# Altium PCB testboard_chip1_wafertest.PcbDoc
Units mm, origin at the board's own origin, x right, y up, seen from the top; angles counter-clockwise.
Board outline 57 x 82.5 mm, 2 copper layers (Top Layer, Bottom Layer); 56 components, 100 nets, 393 pads, 91 vias.
Unrouted connection lines stored in the file: 71.
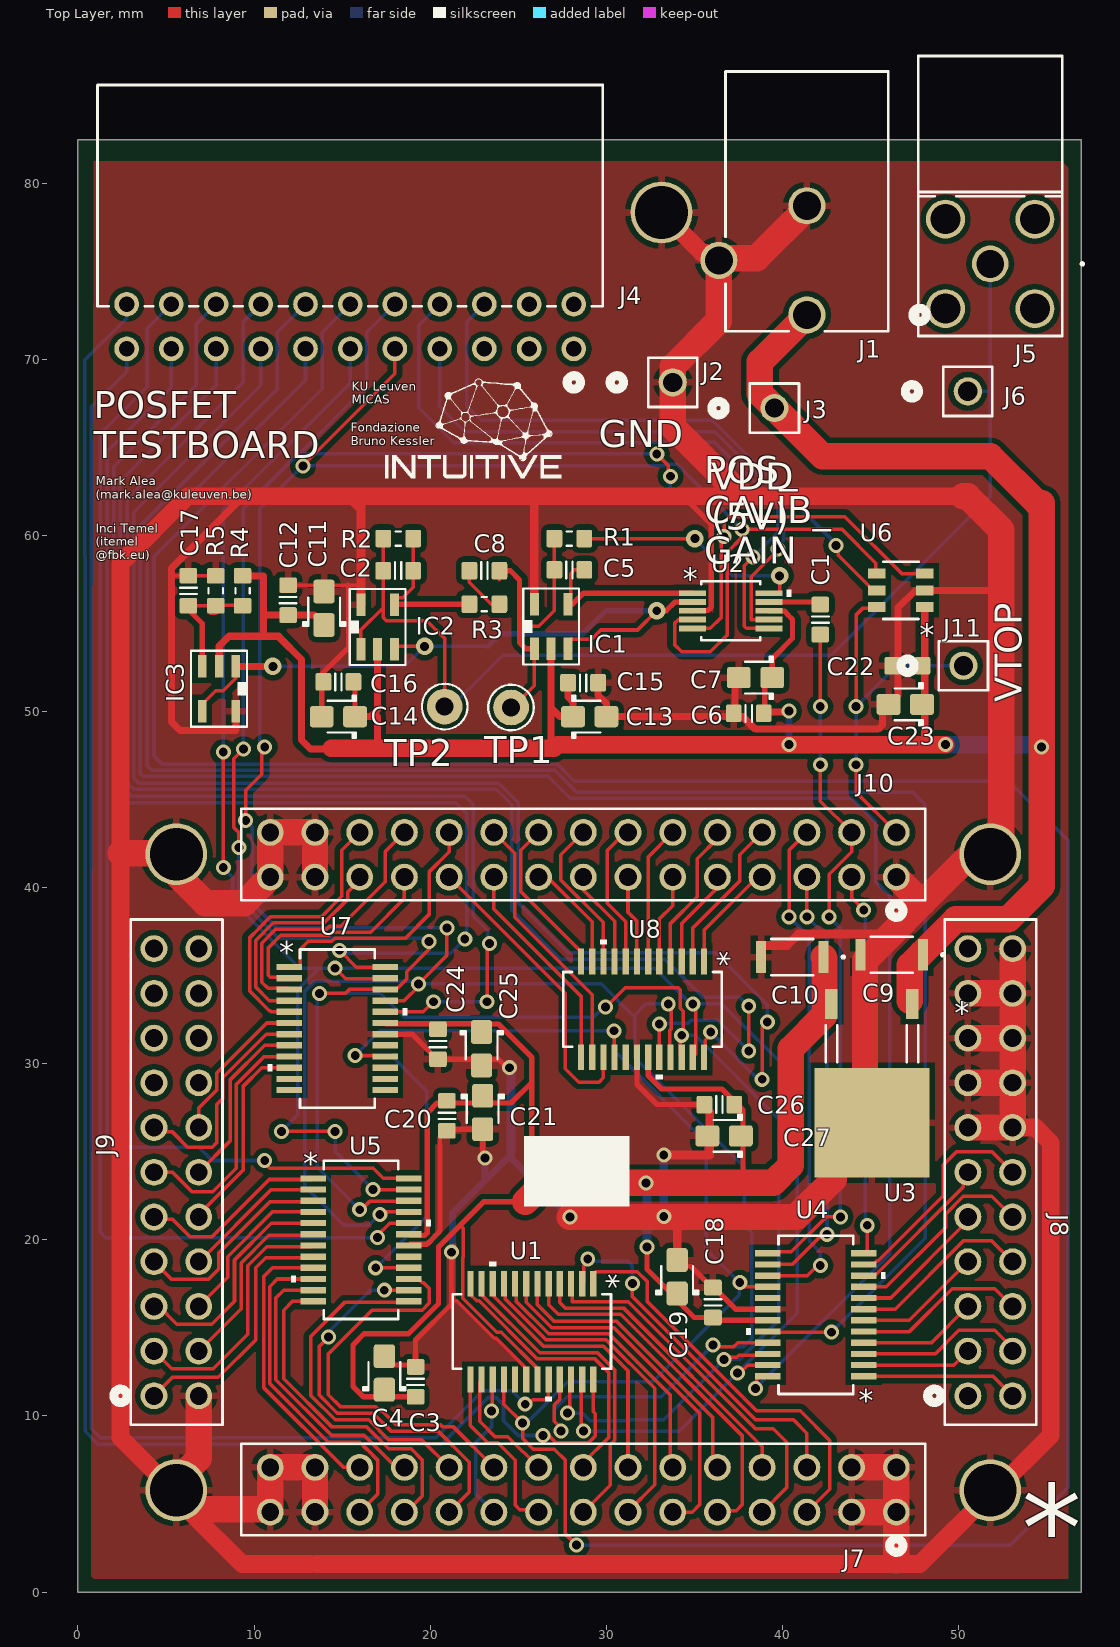
[diagram p0: Top Layer view]
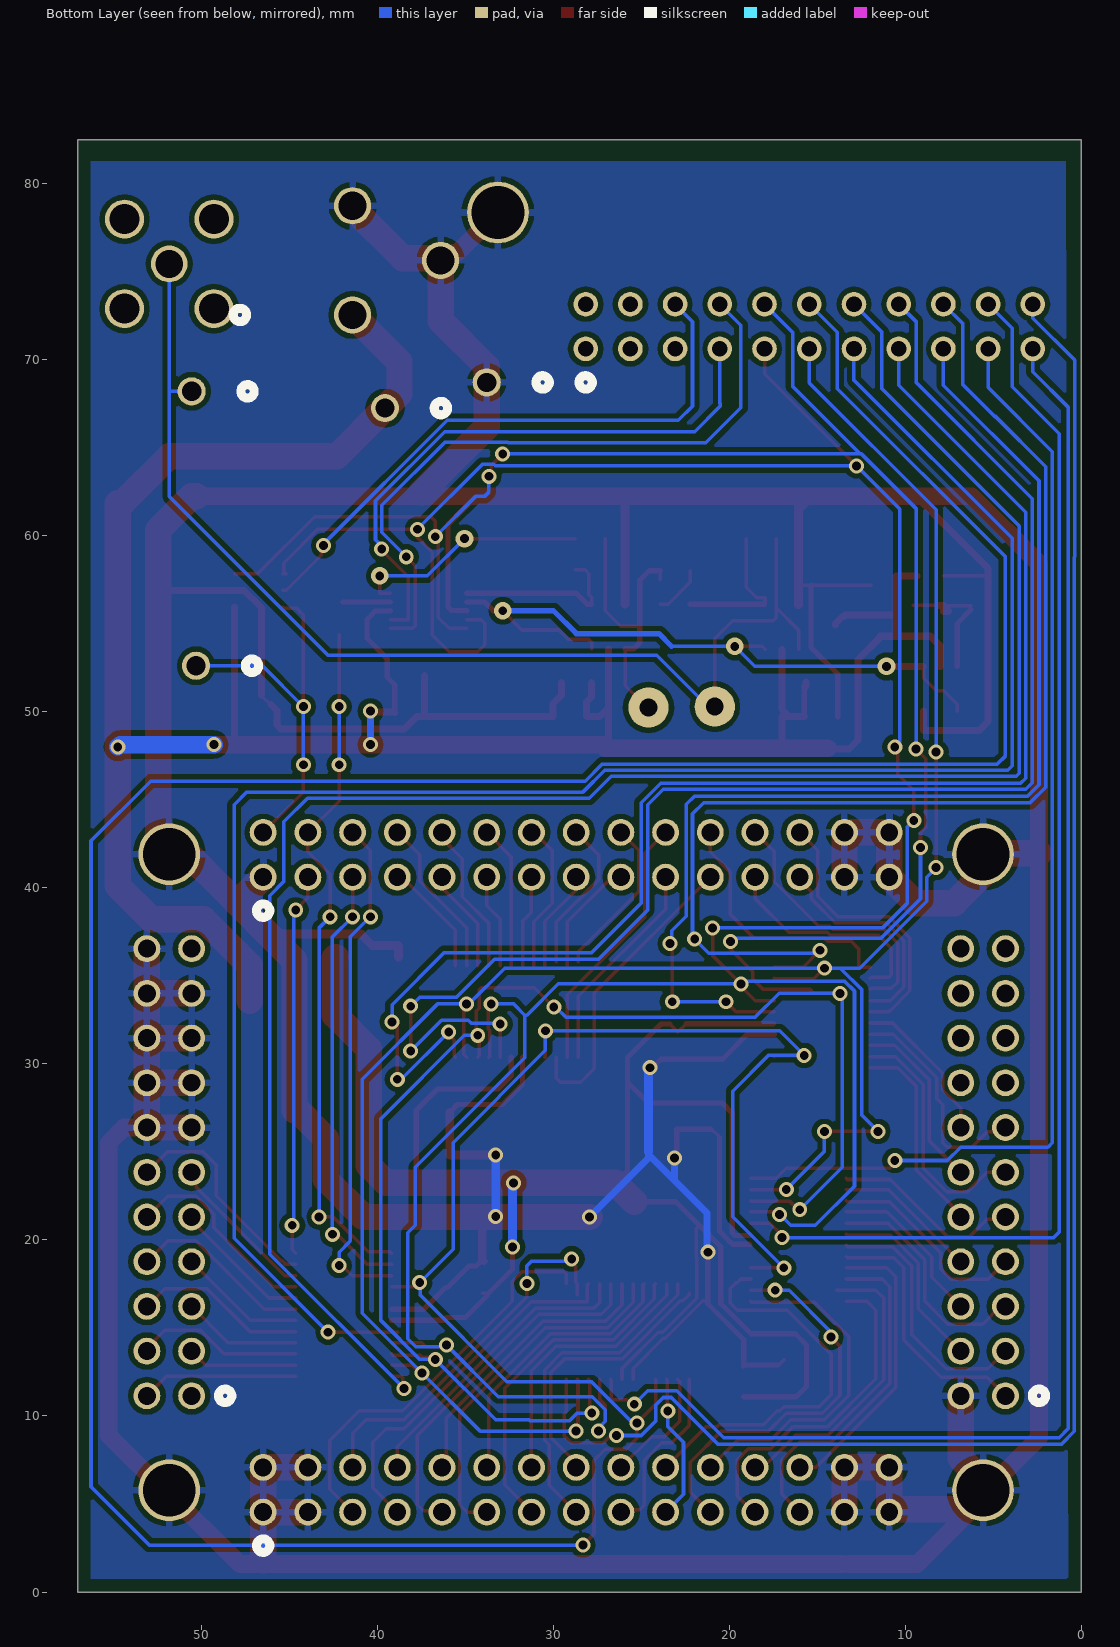
[diagram p1: Bottom Layer view, seen from below]
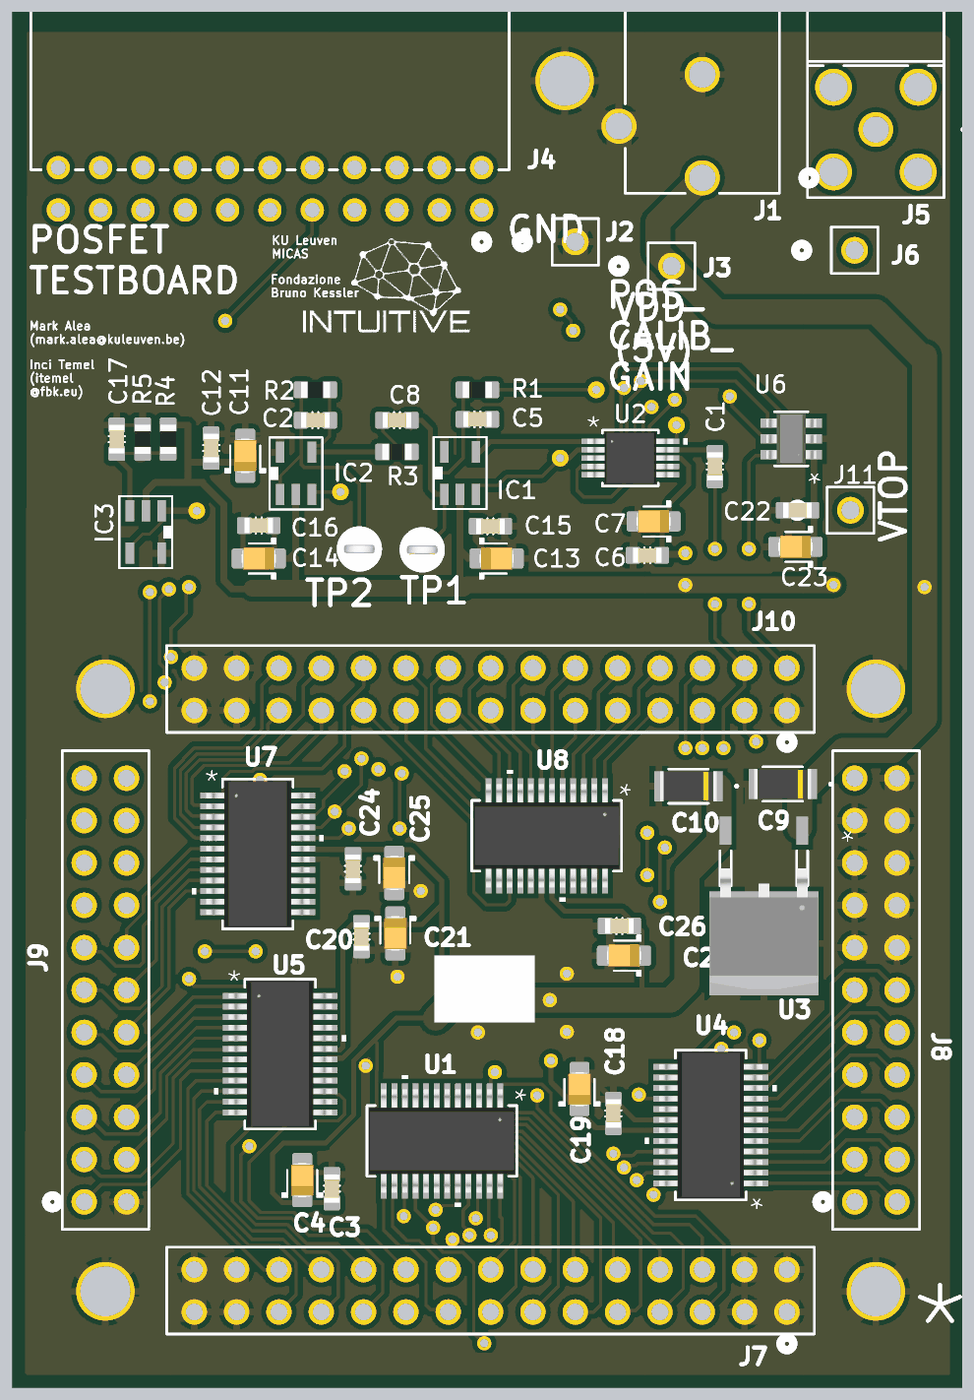
[diagram p2: 3D render of the assembled board from above, using the file's embedded part models]

## Layer stack, top to bottom
Top Solder: solder mask 0.0102, Solder Resist, Dk 3.5
Top Layer: signal copper 0.0356
Dielectric 1: dielectric 0.32, FR-4, Dk 4.8
Bottom Layer: signal copper 0.0356
Bottom Solder: solder mask 0.0102, Solder Resist, Dk 3.5

## Board outline
0,0 57,0 57,82.5 0,82.5

## Design rules (kind name [scope] priority, off if disabled: settings)
BoardOutlineClearance [All] p1: gap=0.25 ignorepadtopadclearanceinfootprint=FALSE except(0: Arc-SplitContinuation Track-SplitContinuation SMDPad-SplitContinuation THPad-SplitContinuation Via-SplitContinuation Fill-SplitContinuation Poly-SplitContinuation Region-SplitContinuation Text-SplitContinuation)
Clearance Clearance-xPP-xTP-xTT [All] p1: gap=0.15 ignorepadtopadclearanceinfootprint=FALSE except(0: Arc-Hole Track-Hole SMDPad-Hole THPad-Hole Via-Hole Fill-Hole Poly-Hole Region-Hole Text-Hole)
ComponentClearance [All] p1: gap=0.25 collisioncheckmode=3 verticalgap=0.25 showdistances=FALSE
DiffPairsRouting [All] p1: maxlimit=0.25 minlimit=0.25 mostfreqgap=0.25 toplayer_minwidth=0.381 toplayer_maxwidth=0.381 toplayer_prefwidth=0.381 bottomlayer_minwidth=0.381 bottomlayer_maxwidth=0.381 bottomlayer_prefwidth=0.381 maxuncoupledlength=12.5
Height [All] p1: minheight=0 maxheight=25 prefheight=12.5
HoleSize HoleSize-PTH [All] p1: absolutevalues=TRUE maxlimit=2 minlimit=0.25 maxpercent=80.000 minpercent=20.000
HoleToHoleClearance [All] p1: gap=0.35 allowstackedmicrovias=TRUE
MinimumAnnularRing "Minimum IAR  >0.45mm" [((ObjectKind = 'Pad') OR (ObjectKind = 'Via')) And (Layer = 'MultiLayer') And (HoleDiameter > AsMM(0.45))] p1: minimumring=0.175 // minimum inner annular ring for pads > 0.45mm finished hole size
MinimumAnnularRing "Minimum IAR <=0.45mm" [((ObjectKind = 'Pad') OR (ObjectKind = 'Via')) And (Layer = 'MultiLayer') And (HoleDiameter <= AsMM(0.45))] p2: minimumring=0.175 // minimum inner annular ring for pads <= 0.45mm finished hole size
MinimumSolderMaskSliver [All] p1: minsoldermaskwidth=0.08
PlaneClearance PlaneClearance-IPI [All] p1: clearance=0.25
PlaneConnect [All] p1: planeconnectstyle=Relief reliefexpansion=0.175 reliefentries=4 reliefconductorwidth=0.2 reliefairgap=0.2
PolygonConnect PolygonConnect-xTW [All] p1: connectstyle=Relief reliefconductorwidth=0.2 reliefentries=4 polygonreliefangle="90 Angle" airgapwidth=0.2
RoutingCorners [All] p1: cornerstyle=45-Degree minsetback=2.5 maxsetback=2.5
RoutingVias "RoutingVias > 0.45mm" [(ObjectKind = 'Via') And (HoleDiameter > AsMM(0.45))] p1: holewidth=0.5 width=0.85 viastyle="Through Hole" minholewidth=0.5 minwidth=0.85 maxholewidth=0.9 maxwidth=1.25 // finishet hole size > 0.45mm
RoutingVias "RoutingVias <= 0.45mm" [(ObjectKind = 'Via') And (HoleDiameter <= AsMM(0.45))] p2: holewidth=0.3 width=0.65 viastyle="Through Hole" minholewidth=0.25 minwidth=0.6 maxholewidth=0.45 maxwidth=0.8 // finishet hole size <= 0.45mm
SilkToSilkClearance [All] p1: silktosilkclearance=0.2
SilkToSolderMaskClearance SilkscreenOverComponentPads [IsPad] p1: minsilkscreentomaskgap=0.2 clearancetoexposedcopper=TRUE
SolderMaskExpansion [All] p1: expansion=0
UnRoutedNet [All] p1: checkbadconnections=TRUE
Width Width-xTW [All] p1: maxlimit=1.5 minlimit=0.15 preferedwidth=0.2
18 further rules are at their usual default settings.

## Components (designator, comment, footprint, x,y, rotation, side; value= is the part's Value field where it differs from the comment)
C1 "approved sub OK" CAPC1608N 42.164,55.237 r270 top value=1n
C2 "47p" CAPC1608N 18.19,58.012 r180 top
C3 "approved sub OK" CAPC1608N 19.177,11.938 r90 top value=100n
C4 "10µ" CAPMP2012X150USR 17.399,12.446 r90 top
C5 "47p" CAPC1608N 27.91,58.062 r180 top
C6 "approved sub OK" CAPC1608N 38.1,49.911 r180 top value=100n
C7 "10µ" CAPMP2012X150USR 38.481,51.943 r180 top
C8 "1n8" CAPC1608N 23.083,58.012 r180 top
C9 "C3216X5R1A686M160AC" CAP_3216_TDK 46.228,36.195 r180 top
C10 "C3216X5R1A686M160AC" CAP_3216_TDK 40.576,36.068 r180 top
C11 "10µ" CAPMP2012X150USR 13.977,55.88 r90 top
C12 "approved sub OK" CAPC1608N 11.938,56.339 r90 top value=100n
C13 "10µ" CAPMP2012X150USR 29.066,49.719 r0 top
C14 "10µ" CAPMP2012X150USR 14.79,49.719 r180 top
C15 "approved sub OK" CAPC1608N 28.69,51.647 r0 top value=100n
C16 "approved sub OK" CAPC1608N 14.79,51.697 r180 top value=100n
C17 "approved sub OK" CAPC1608N 6.271,56.872 r90 top value=100n
C18 "approved sub OK" CAPC1608N 36.069,16.447 r90 top value=100n
C19 "10µ" CAPMP2012X150USR 34.036,17.907 r90 top
C20 "approved sub OK" CAPC1608N 20.955,27.051 r270 top value=100n
C21 "10µ" CAPMP2012X150USR 22.987,27.239 r270 top
C22 "approved sub OK" CAPC1608N 47.117,52.612 r180 top value=100n
C23 "10µ" CAPMP2012X150USR 46.99,50.419 r180 top
C24 "approved sub OK" CAPC1608N 20.447,31.115 r270 top value=100n
C25 "10µ" CAPMP2012X150USR 22.924,30.861 r270 top
C26 "approved sub OK" CAPC1608N 36.43,27.686 r180 top value=100n
C27 "10µ" CAPMP2012X150USR 36.703,25.908 r180 top
IC1 "MCP6L91RT-E/OT" SOT23-5 25.921,53.572 r90 top
IC2 "MCP6L91RT-E/OT" SOT23-5 16.071,53.546 r90 top
IC3 "MCP6L91RT-E/OT" SOT23-5 8.963,52.578 r270 top
J1 "FC681465P" CONN3_FC681465P_CLF 41.402,72.54 r180 top
J2 "901200761" CONN_90120-0761_MOL 33.782,68.707 r0 top
J3 "901200761" CONN_90120-0761_MOL 39.56,67.246 r0 top
J4 "TSW-111-08-G-D-RA" CON23_2X11_TR_TSW_SAI 15.463,71.882 r0 top
J5 "142-0701-301" CONN_142-0701-301_CIN 51.816,75.438 r0 top
J6 "901200761" CONN_90120-0761_MOL 50.543,68.199 r0 top
J7 "SSW-115-01-T-D" CON30_2X15_TU_SSQ 28.702,5.81 r0 top
J8 "SSW-111-01-G-D" CON23_2X11_TU_SSQ 51.816,23.844 r270 top
J9 "SSW-111-01-G-D" CON23_2X11_TU_SSQ 5.588,23.844 r270 top
J10 "SSW-115-01-T-D" CON30_2X15_TU_SSQ 28.702,41.878 r0 top
J11 "901200761" CONN_90120-0761_MOL 50.292,52.612 r0 top
R1 "Thick Film" RESC1608N 27.91,59.837 r180 top value=100K
R2 "Thick Film" RESC1608N 18.19,59.837 r180 top value=22K
R3 "Thick Film" RESC1608N 23.083,56.112 r180 top value=2K21
R4 "Thick Film" RESC1608N 9.349,56.872 r270 top value=10K
R5 "Thick Film" RESC1608N 7.824,56.872 r90 top value=10K
TP1 "TESTPOINT_THT_MINI" TP-THT-MINI 24.599,50.241 r0 top
TP2 "TESTPOINT_THT_MINI" TP-THT-MINI 20.828,50.292 r0 top
U1 "MAX11625EEG+" 21-0055H_24_MXM 25.781,14.795 r270 top
U2 "AD5425YRMZ" RM_10_ADI 37.083,55.737 r0 top
U3 "BD33C0AFP-CE2" TO252-3_ROM 45.099,26.645 r180 top
U4 "MAX11625EEG+" 21-0055H_24_MXM 41.91,15.748 r180 top
U5 "MAX11625EEG+" 21-0055H_24_MXM 16.075,20.002 r0 top
U6 "MAX5711EUT+T" 21-0058I_MXM 46.736,56.896 r180 top
U7 "MAX11625EEG+" 21-0055H_24_MXM 14.732,32.004 r0 top
U8 "MAX11625EEG+" 21-0055H_24_MXM 32.067,33.093 r270 top

## Footprints (in the part's own frame and the unit in brackets; to place one, negate y for a bottom-side part, rotate by r counter-clockwise, add the part's x,y. Pads: shape width x height; smd on the part's side, far side on the other; paste and mask are expansions set on the pad)
21-0055H_24_MXM [mil]
  rect 57.28x13.97 smd paste+0 mask+0: 1(-107.14,137.5) 2(-107.14,112.5) 3(-107.14,87.5) 4(-107.14,62.5) 5(-107.14,37.5) 6(-107.14,12.5) 7(-107.14,-12.5) 8(-107.14,-37.5) 9(-107.14,-62.5) 10(-107.14,-87.5) 11(-107.14,-112.5) 12(-107.14,-137.5) 13(107.14,-137.5) 14(107.14,-112.5) 15(107.14,-87.5) 16(107.14,-62.5) 17(107.14,-37.5) 18(107.14,-12.5) 19(107.14,12.5) 20(107.14,37.5) 21(107.14,62.5) 22(107.14,87.5) 23(107.14,112.5) 24(107.14,137.5)
  silkscreen extent -156,-177 156,177, body extent -122,-172 122,172, height 69
21-0058I_MXM [mm]
  rect 0.972x0.558 smd paste+0 mask+0: 1(-1.362,0.95) 2(-1.362,0) 3(-1.362,-0.95) 4(1.362,-0.95) 5(1.362,0) 6(1.362,0.95)
  silkscreen extent -1,-1.63 1,1.63, body extent -1.5,-1.5 1.5,1.5, height 1.45
CAP_3216_TDK [mil]
  rect 21.78x71 smd paste+0 mask+0: 1(-69.89,0) 2(69.89,0)
  silkscreen extent -117,-41 47,41, body extent -67,-36 67,36, height 49
CAPC1608N [mm] "Chip Capacitor, Body 1.6x0.8mm, 0603, IPC Medium Density"
  round 0.254 on Mech14: 0(0,0)
  rrect25% 0.9x1 smd: 1(-0.85,0) 2(0.85,0)
  Top Layer pour cut-out: -0.4,0.6 0.4,0.6 0.4,-0.6 -0.4,-0.6
  silkscreen extent -0.18,-0.48 0.18,0.48, body extent -0.85,-0.45 0.85,0.45, height 0.89
CAPMP2012X150USR [mm]
  round 0.254 on Mech14: 0(0,0)
  rrect25% 1.35x1.2 smd: 1(-0.95,0) 2(0.95,0)
  Top Layer pour cut-out: -0.4,0.8 0.4,0.8 0.4,-0.8 -0.4,-0.8
  silkscreen extent -1,-1.2 0.6,1.2, body extent -1.02,-0.67 1.03,0.68, height 1.5
CON23_2X11_TR_TSW_SAI [mil]
  round 55 hole 35 mask+0: 1(500,-50) 2(500,50) 3(400,-50) 4(400,50) 5(300,-50) 6(300,50) 7(200,-50) 8(200,50) 9(100,-50) 10(100,50) 11(0,-50) 12(0,50) 13(-100,-50) 14(-100,50) 15(-200,-50) 16(-200,50) 17(-300,-50) 18(-300,50) 19(-400,-50) 20(-400,50) 21(-500,-50) 22(-500,50)
  silkscreen extent -565,-140 565,540, body extent 0,0 10,10, height 10
CON23_2X11_TU_SSQ [mil]
  round 60 hole 40 mask+0: 1(500,-50) 2(500,50) 3(400,-50) 4(400,50) 5(300,-50) 6(300,50) 7(200,-50) 8(200,50) 9(100,-50) 10(100,50) 11(0,-50) 12(0,50) 13(-100,-50) 14(-100,50) 15(-200,-50) 16(-200,50) 17(-300,-50) 18(-300,50) 19(-400,-50) 20(-400,50) 21(-500,-50) 22(-500,50)
  silkscreen extent -565,-140 565,103, body extent 0,0 10,10, height 10
CON30_2X15_TU_SSQ [mil]
  round 60 hole 40 mask+0: 1(700,-50) 2(700,50) 3(600,-50) 4(600,50) 5(500,-50) 6(500,50) 7(400,-50) 8(400,50) 9(300,-50) 10(300,50) 11(200,-50) 12(200,50) 13(100,-50) 14(100,50) 15(0,-50) 16(0,50) 17(-100,-50) 18(-100,50) 19(-200,-50) 20(-200,50) 21(-300,-50) 22(-300,50) 23(-400,-50) 24(-400,50) 25(-500,-50) 26(-500,50) 27(-600,-50) 28(-600,50) 29(-700,-50) 30(-700,50)
  silkscreen extent -765,-140 765,103, body extent 0,0 10,10, height 10
CONN3_FC681465P_CLF [mil]
  round 83 hole 63: 1(0,0) 2(196.85,-122.05) 3(0,-244.09)
  silkscreen extent -267,-545 182,36, body extent 0,0 10,10, height 10
CONN_142-0701-301_CIN [mil]
  round 82 hole 62 mask+0: 1(0,0)
  round 87 hole 67 mask+0: 2(-100,100) 3(-100,-100) 4(100,-100) 5(100,100)
  silkscreen extent -161,-161 209,465, body extent 0,0 10,10, height 10
CONN_90120-0761_MOL [mil]
  round 63 hole 43 mask+0: 1(0,0)
  silkscreen extent -140,-55 55,55, body extent 0,0 10,10, height 10
RESC1608N [mm] "Chip Resistor, Body 1.6x0.8mm, 0603, IPC Medium Density"
  round 0.254 on Mech14: 0(0,0)
  rrect25% 0.9x1 smd: 1(-0.85,0) 2(0.85,0)
  Top Layer pour cut-out: -0.4,0.6 0.4,0.6 0.4,-0.6 -0.4,-0.6
  silkscreen extent -0.15,-0.41 0.15,0.41, body extent -0.87,-0.47 0.88,0.48, height 0.54
RM_10_ADI [mil]
  rect 60x13 smd paste+0 mask+0: 1(-85.5,39.37) 2(-85.5,19.68) 3(-85.5,0) 4(-85.5,-19.69) 5(-85.5,-39.37) 6(85.5,-39.37) 7(85.5,-19.69) 8(85.5,0) 9(85.5,19.68) 10(85.5,39.37)
  silkscreen extent -66,-66 136,66, body extent -101,-61 101,61, height 43
SOT23-5 [mil]
  rect 50x20 smd: 1(0,0) 2(0,-37) 3(0,-75) 4(100,-75) 5(100,0)
  silkscreen extent -35,-100 135,25, body extent 2,-95 98,20, height 52
TO252-3_ROM [mil]
  rect 27.97x66.56 smd paste+0 mask+0: 1(-90.55,-266) 3(90.55,-266)
  rect 258x245 smd paste+0 mask+0: 2(0,0)
  silkscreen extent -104,-219 104,-136, body extent -128,-178 128,109, height 98
TP-THT-MINI [mil]
  round 80 / inner round 80 / far side round 90 hole 40: 1(0,0)
  silkscreen extent -51,-51 51,51, body extent -49,-49 49,49, height 181

## Part data
C1: library part CAPC_1n_0603_100V, "Capacitor SMD Cer 1nF 10% 100V X7R 0603", Manufacturer 1="Murata Electronics North America", Manufacturer Part Number 1=GCM188R72A102KA37D, Operating Temperature="-55°C ~ 125°C", Package / Case="0603 (1608 metric)", Ratings="100V; X7R", Supplier Part Number 1=490-4780-1-ND, Tolerance=±10%, ComponentLink1Description=http://search.murata.co.jp/Ceramy/image/img/PDF/ENG/GCM188R72A102KA37.pdf, ComponentLink1URL=http://search.murata.co.jp/Ceramy/image/img/PDF/ENG/GCM188R72A102KA37.pdf, Material=ceramic, Size / Dimension="0.063\" L x 0.031\" W (1.60mm x 0.80mm)", Supplier 1=Digi-Key, Thickness (Max)="0.035\" (0.90mm)"
C2 C5: library part CAPC_47p_0603, "Capacitor SMD Cer 47pF 0603", Operating Temperature="-55°C ~ 125°C", Package / Case="0603 (1608 Metric)", Ratings="50V; NP0", Tolerance=±5%, ComponentLink1Description=http://www.avx.com/docs/Catalogs/ccog.pdf, ComponentLink1URL=http://www.avx.com/docs/Catalogs/ccog.pdf, ComponentLink2Description=http://www.tdk.com/pdf/tight_tol_B11.pdf, ComponentLink2URL=http://www.tdk.com/pdf/tight_tol_B11.pdf, ComponentLink3Description=http://www.kemet.com/datasheets&C0603C221F5GACTU, ComponentLink3URL=http://www.kemet.com/datasheets&C0603C221F5GACTU, Size / Dimension="0.063\" L x 0.031\" W (1.60mm x 0.80mm)", Thickness (Max)="0.037\" (0.95mm)"
C3 C6 C12 C15 C16 C17 C18 C20 C22 C24 C26: library part CAPC_100n_0603, "Capacitor SMD Cer 100nF 10% 50V X7R 0603", Manufacturer 1="AVX Corporation", Manufacturer 2="TDK Corporation", Manufacturer Part Number 1=06035C104KAT2A, Manufacturer Part Number 2=C1608X7R1H104K, Package / Case="0603 (1608 Metric)", Ratings="50V; X7R", Supplier Part Number 1=478-5052-1-ND, Tolerance=±10%, ComponentLink1Description=http://www.avx.com/docs/Catalogs/cx7r.pdf, ComponentLink1URL=http://www.avx.com/docs/Catalogs/cx7r.pdf, ComponentLink2Description=http://product.tdk.com/capacitor/mlcc/en/documents/mlcc_commercial_general_en.pdf, ComponentLink2URL=http://product.tdk.com/capacitor/mlcc/en/documents/mlcc_commercial_general_en.pdf, Material=ceramic, Supplier 1=Digi-Key, Supplier 2=Digi-Key, Supplier Part Number 2=445-1314-1-ND
C4 C7 C11 C13 C14 C19 C21 C23 C25 C27: library part CAPT_10u_0805_10V, "Capacitor SMD Tantalum 10uF 20% 10V 0805", Manufacturer 1="AVX Corporation", Manufacturer Part Number 1=TAJP106M010RNJ, Package / Case="0805 (2012 metric)", Ratings=10V, Supplier Part Number 1=478-3281-1-ND, Tolerance=±20%, Material=Tantalum, Supplier 1=Digi-Key
C8: library part CAPC_1n8_0603, "Capacitor SMD Cer 1.8nF 0603", Operating Temperature="-55°C ~ 125°C", Package / Case="0603 (1608 Metric)", Ratings="50V; NP0", Tolerance=±5%, ComponentLink1Description=http://www.avx.com/docs/Catalogs/ccog.pdf, ComponentLink1URL=http://www.avx.com/docs/Catalogs/ccog.pdf, ComponentLink2Description=http://www.tdk.com/pdf/tight_tol_B11.pdf, ComponentLink2URL=http://www.tdk.com/pdf/tight_tol_B11.pdf, ComponentLink3Description=http://www.kemet.com/datasheets&C0603C221F5GACTU, ComponentLink3URL=http://www.kemet.com/datasheets&C0603C221F5GACTU, Size / Dimension="0.063\" L x 0.031\" W (1.60mm x 0.80mm)", Thickness (Max)="0.037\" (0.95mm)"
C9 C10: "No Description Available", Mfr_Name=TDK, Copyright="Copyright (C) 2022 Ultra Librarian. All rights reserved.", Manufacturer_Part_Number=C3216X5R1A686M160AC, RefDes=RefDes, Type=DEV
IC1 IC2 IC3: "10MHz Opamp"
J1: "No Description Available", Mfr_Name=Cliff, Copyright="Copyright (C) 2022 Ultra Librarian. All rights reserved.", Manufacturer_Part_Number=FC681465P, RefDes=RefDes, Type=DEV
J2 J3 J6 J11: "No Description Available", Mfr_Name="Molex Connector Corporation", Copyright="Copyright (C) 2022 Ultra Librarian. All rights reserved.", Manufacturer_Part_Number=901200761, RefDes=RefDes, Type=DEV
J4 J7 J8 J9 J10: "No Description Available", Mfr_Name="Samtec Inc", Copyright="Copyright (C) 2022 Ultra Librarian. All rights reserved.", RefDes=RefDes, Type=DEV
  J4: Manufacturer_Part_Number=TSW-111-08-G-D-RA
  J7 J10: Manufacturer_Part_Number=SSW-115-01-T-D
  J8 J9: Manufacturer_Part_Number=SSW-111-01-G-D
J5: "No Description Available", Mfr_Name="Cinch Connectivity Solutions", Copyright="Copyright (C) 2022 Ultra Librarian. All rights reserved.", Manufacturer_Part_Number=142-0701-301, RefDes=RefDes, Type=DEV
R1: library part RES_100K_0603_1%, "Resistor SMD chip 100k Ohm 0.1W 1% 0603", Manufacturer 1=Vishay/Dale, Manufacturer Part Number 1=CRCW0603100KFKEA, Package / Case="0603 (2012 metric)", Ratings=1/10W, Supplier Part Number 1=541-100KHCT-ND, Tolerance=±1%, Supplier 1=Digi-Key
R2: library part RES_22K_0603_1%, "Resistor SMD chip 22k Ohm 0.1W 1% 0603", Package / Case="0603 (1608 Metric)", Ratings=1/10W, Tolerance=±1%
R3: library part RES_2K21_0603_1%, "Resistor SMD chip 2.21k Ohm 0.1W 1% 0603", Package / Case="0603 (1608 Metric)", Ratings=1/10W, Tolerance=±1%
R4 R5: library part RES_10K_0603_1%, "Resistor SMD chip 10k Ohm 0.1W 1% 0603", Manufacturer 1=Yageo, Manufacturer Part Number 1=RC0603FR-0710KL, Package / Case="0603 (1608 Metric)", Ratings=1/10W, Supplier Part Number 1=311-10.0KHRCT-ND, Tolerance=±1%, Supplier 1=Digi-Key
TP1 TP2: "Test Point PCB mount Miniature White", Manufacturer 1="Keystone Electronics", Manufacturer Part Number 1=5002, Supplier Part Number 1=5002K-ND, Material="Base, Nylon 46, UL 94V-0", Mounting Type="0.040\" (1.0mm) Hole Diameter", Supplier 1=Digi-Key
U1 U4 U5 U6 U7 U8: "No Description Available", Mfr_Name="Maxim Integrated Products", Copyright="Copyright (C) 2022 Ultra Librarian. All rights reserved.", RefDes=RefDes, Type=DEV
  U1 U4 U5 U7 U8: Manufacturer_Part_Number=MAX11625EEG+
  U6: Manufacturer_Part_Number=MAX5711EUT+T
U2: "No Description Available", Built_By=EMA_UL_Team, Copyright="Copyright (C) 2018 Accelerated Designs. All rights reserved", Manufacturer_Part_Number=AD5425YRMZ, RefDes=RefDes, SourceLibrary=Analog_2012-01-01_3, Type=DEV, Vendor="Analog Devices Inc"
U3: "No Description Available", Mfr_Name="ROHM Semiconductor", Copyright="Copyright (C) 2022 Ultra Librarian. All rights reserved.", Manufacturer_Part_Number=BD33C0AFP-CE2, RefDes=RefDes, Type=DEV

## Free pads (board coordinates)
  round 3.508 hole 3 mask+0: 1(51.816,5.778) 2(5.588,5.778) 3(51.816,41.91) 4(5.588,41.91) 5(33.147,78.359)

## Via types
v1: diameter 0.85, hole 0.5, Top Layer to Bottom Layer, 86 vias
v2: diameter 1, hole 0.5, Top Layer to Bottom Layer, 5 vias

## Nets (pads, with @x,y where several pads share a name; then routed paths per layer and width w, separated by ;. In a path a pad name is that pad's centre, name@x,y a point inside that pad or via, vN(x,y) a via of type N, cw(c..) or ccw(c..) an arc to the next point about the centre after c; other vN are vias at no path point)
3P3V: C3.1 C4.1 C10.1 C18.1 C19.1 C20.1 C21.1 C24.1 C25.1 C26.1 C27.1 U1.19 U3.3 U4.19 U5.19 U7.19 U8.19 | length 116.7
  Top Layer w0.2: U7.19 U7.19@17.496,32.279 ; U5.19 U5.19@18.86,20.256 ; 21.717,20.837 21.884,20.67 21.884,19.024 21.861,19.002 21.861,16.686 23.788,14.759 24.037,14.759 26.098,12.698 U1.19 ; C25.1@22.456,32.279 C25.1 C25.1@23.37,32.258 ; C19.1@33.699,16.957 C19.1 ; C18.1 C18.1@36.235,15.43
  Top Layer w0.3: U7.19@17.496,32.279 C25.1@22.456,32.279 ; U5.19@18.86,20.256 19.685,20.256 19.843,20.415 19.843,27.218 20.399,27.774 24.599,27.774 25.781,28.956 ; C3.1 16.217,11.088 15.621,11.684 15.621,14.032 16.256,14.667 18.777,14.667 20.484,16.374 20.484,19.604 21.717,20.837 23.041,22.162 25.4,22.162 ; C25.1@23.37,32.258 23.886,32.258 25.781,30.363 25.781,28.956 ; 26.479,23.241 25.781,23.939 25.781,28.956 ; v1(32.324,19.604) 32.324,18.333 C19.1@33.699,16.957 ; U8.19 32.385,29.337 33.147,28.575 36.576,28.575 37.78,27.371 37.78,23.368 37.653,23.241 ; C19.1@33.782,16.816 35.001,15.597 C18.1 ; C18.1@36.235,15.43 U4.19
  Top Layer w1.5: 25.4,22.162 26.479,23.241 v1(32.258,23.241) 37.653,23.241 39.486,23.241 40.482,24.236 40.482,30.851 42.404,32.773 42.404,36.016 C10.1
  Bottom Layer w0.3: v1(32.258,23.241) v1@32.324,23.175
  Bottom Layer w0.5: v1(32.324,19.604) v1@32.324,23.175
5V: C6.1 C7.1 C9.1 C11.1 C12.1 C13.1 C14.1 C15.1 C16.1 C22.1 C23.1 IC1.2 IC2.2 IC3.2 J1.1 J3.1 R4.1 U2.8 U3.1 U6.1 | length 156.2
  Top Layer w0.2: 14.34,47.887 14.39,47.937
  Top Layer w0.3: C14.1 C16.1@15.74,51.437 ; C6.1@39.003,49.964 39.003,51.515 C7.1 39.431,52.993 39.497,53.059 39.497,53.086 40.583,54.172 40.583,55.245 40.317,55.511 40.317,55.526 40.121,55.721 39.27,55.721 U2.8
  Top Layer w0.4: IC3.2 8.023,53.739 8.573,54.289 10.541,54.289 ; R4.1 10.541,57.722 10.541,55.489 ; 11.43,54.229 12.7,52.959 12.7,48.387 13.2,47.887 14.34,47.887 ; 11.43,54.289 10.541,54.289 ; C11.1 13.977,55.005 13.577,55.405 13.502,55.405 13.418,55.489 C12.1 10.541,55.489 ; C16.1 15.64,51.437 C16.1@15.74,51.437 ; C14.1 16.613,49.719 ; IC2.2 17.011,50.116 16.613,49.719 ; 17.19,47.937 17.011,48.116 17.011,49.719 16.613,49.719 ; IC1.2 26.861,50.241 ; 27.06,47.937 26.861,48.136 26.861,50.241 ; C15.1 27.84,50.834 28.116,50.558 C13.1 27.383,49.719 26.861,50.241 ; C6.1@39.003,49.964 39.013,49.975 40.323,49.975 v1(40.386,50.038) ; 48.098,48.133 U6.1 ; 10.541,54.289 10.541,55.489
  Top Layer w1: 14.39,47.937 17.19,47.937 27.06,47.937 27.257,48.133 v1(40.386,48.133) 48.098,48.133 v1(49.276,48.133)
  Top Layer w1.5: J1.1 38.735,69.873 38.735,68.072 J3.1 42.291,64.516 51.816,64.516 54.483,61.849 54.737,61.849 v1(54.737,48.006) 54.737,40.111 52.832,38.206 49.858,38.206 47.925,36.273 47.244,35.592 47.244,35.204 47.244,34.127 U3.1@47.244,33.591
  Bottom Layer w0.4: v1(40.386,48.133) v1(40.386,50.038)
  Bottom Layer w1: v1(49.276,48.133) 54.61,48.133 v1(54.737,48.006)
AIN0_BOT: J10.7 U8.1 | length 6.6
  Top Layer w0.2: U8.1@35.56,35.56 U8.1 35.56,37.592 38.576,40.608 J10.7
AIN0_LEFT: J8.2 U4.1 | length 8.9
  Top Layer w0.2: U4.1 51.974,12.255 J8.2
AIN0_RIGHT: J9.9 U5.1 | length 10.9
  Top Layer w0.2: J9.9 4.459,21.163 5.38,21.163 6.35,20.193 7.619,20.193 10.858,23.431 13.29,23.431 U5.1
AIN0_RIGHTL: J10.22 U7.1 | length 14.9
  Top Layer w0.2: U7.1 12.561,35.496 12.638,35.574 12.638,36.514 13.081,36.957 14.412,36.957 14.579,37.124 18.582,37.124 19.939,38.481 19.939,40.896 21.082,42.039 J10.22
AIN0_TOP: J7.5 U1.1 | length 23.3
  Top Layer w0.2: U1.1 29.273,18.067 29.408,18.201 31.776,18.201 32.324,17.653 32.324,16.508 38.544,10.287 41.021,10.287 42.704,8.604 42.704,5.842 J7.5
AIN1_BOT: J10.8 U8.2 | length 9.2
  Top Layer w0.2: U8.2@34.925,35.56 U8.2 34.925,37.719 37.592,40.386 37.592,41.878 J10.8
AIN1_LEFT: J8.3 U4.2 | length 6.2
  Top Layer w0.2: U4.2 49.753,12.89 J8.3
AIN1_RIGHT: J9.8 U5.2 | length 8.2
  Top Layer w0.2: J9.8 6.889,18.764 10.986,22.86 U5.2
AIN1_RIGHTL: J10.23 U7.2 | length 12.9
  Top Layer w0.2: U7.2 11.947,34.925 10.922,34.925 10.795,35.052 10.795,36.576 11.526,37.307 14.267,37.307 14.434,37.474 16.627,37.474 18.542,39.389 J10.23
AIN1_TOP: J7.6 U1.2 | length 21.7
  Top Layer w0.2: U1.2@28.639,16.893 U1.2 28.716,17.594 28.716,18.507 28.956,18.747 v1(28.956,18.923) ; v1(31.496,17.526) 31.496,16.764 38.481,9.779 40.64,9.779 41.402,9.017 J7.6
  Bottom Layer w0.2: v1(28.956,18.923) 29.083,18.796 31.242,18.796 31.496,18.542 v1(31.496,17.526)
AIN2_BOT: J10.9 U8.3 | length 5.9
  Top Layer w0.2: U8.3@34.29,35.56 U8.3 34.29,37.973 36.322,40.005 J10.9
AIN2_LEFT: J8.4 U4.3 | length 9.6
  Top Layer w0.2: U4.3 48.704,13.525 50.038,14.859 52.07,14.859 53.086,13.843 J8.4
AIN2_RIGHT: J9.7 U5.3 | length 11.8
  Top Layer w0.2: J9.7 5.33,17.752 7.401,17.752 8.001,18.351 8.001,19.258 10.904,22.162 13.29,22.162 U5.3
AIN2_RIGHTL: J10.24 U7.3 | length 15.7
  Top Layer w0.2: U7.3 11.947,34.29 10.795,34.29 10.445,34.64 10.445,36.861 11.241,37.657 14.122,37.657 14.289,37.824 14.932,37.824 17.453,40.345 17.453,42.059 J10.24
AIN2_TOP: J7.7 U1.3 | length 21.1
  Top Layer w0.2: U1.3 28.081,17.439 28.081,16.496 31.256,16.496 38.481,9.271 39.497,9.271 40.259,8.509 40.259,5.937 J7.7
AIN3_BOT: J10.10 U8.4 | length 8.7
  Top Layer w0.2: U8.4@33.655,35.56 U8.4 33.655,37.973 35.179,39.497 35.179,41.656 36.322,42.799 J10.10
AIN3_LEFT: J8.5 U4.4 | length 6.8
  Top Layer w0.2: U4.4 48.483,14.16 J8.5
AIN3_RIGHT: J9.6 U5.4 | length 9.4
  Top Layer w0.2: J9.6 8.509,17.875 8.509,19.05 11.049,21.59 U5.4
AIN3_RIGHTL: J10.25 U7.4 | length 12.6
  Top Layer w0.2: U7.4 10.87,33.591 10.095,34.367 10.095,37.006 11.096,38.007 13.977,38.007 15.336,39.366 15.336,39.772 16.002,40.438 J10.25
AIN3_TOP: J7.8 U1.4 | length 17.1
  Top Layer w0.2: U1.4 27.368,16.447 27.686,16.129 30.988,16.129 38.862,8.255 J7.8
AIN4_BOT: J10.11 U8.5 | length 5.4
  Top Layer w0.2: U8.5@33.02,35.56 U8.5 33.02,38.227 33.782,38.989 J10.11
AIN4_LEFT: J8.6 U4.5 | length 9.9
  Top Layer w0.2: U4.5 47.228,14.795 49.669,17.236 52.074,17.236 J8.6
AIN4_RIGHT: J9.5 U5.5 | length 13.2
  Top Layer w0.2: J9.5 4.604,16.224 5.616,15.212 7.592,15.212 8.89,16.51 8.89,18.857 10.988,20.955 U5.5
AIN4_RIGHTL: J10.26 U7.5 | length 16.1
  Top Layer w0.2: U7.5 10.983,32.956 10.92,33.02 10.87,33.02 9.745,34.145 9.745,37.151 10.287,37.693 10.287,37.719 10.925,38.357 13.833,38.357 14.986,39.51 14.986,42.132 J10.26
AIN4_TOP: J7.9 U1.5 | length 20.8
  Top Layer w0.2: U1.5 26.733,16.319 27.274,15.779 30.83,15.779 37.719,8.89 37.719,4.953 37.384,4.618 36.4,4.618 J7.9
AIN5_BOT: J10.12 U8.6 | length 8.2
  Top Layer w0.2: U8.6@32.385,35.56 U8.6 32.385,41.751 J10.12
AIN5_LEFT: J8.7 U4.6 | length 7.3
  Top Layer w0.2: U4.6 47.213,15.43 J8.7
AIN5_RIGHT: J9.4 U5.6 | length 10.8
  Top Layer w0.2: J9.4 9.271,16.097 9.271,18.687 10.841,20.256 13.29,20.256 U5.6
AIN5_RIGHTL: J9.14 U7.6 | length 8.8
  Top Layer w0.2: J9.14 6.858,27.493 7.87,28.505 7.87,29.46 10.731,32.322 U7.6
AIN5_TOP: J7.10 U1.6 | length 16.8
  Top Layer w0.2: U1.6 26.098,16.319 27.051,15.367 30.607,15.367 36.069,9.905 36.069,7.333 J7.10
AIN6_BOT: J10.13 U8.7 | length 5.3
  Top Layer w0.2: J10.13 31.242,38.608 31.75,38.1 U8.7 U8.7@31.75,35.56
AIN6_LEFT: J8.8 U4.7 | length 10.5
  Top Layer w0.2: U4.7 46.416,16.066 50.29,19.939 51.911,19.939 J8.8
AIN6_RIGHT: J9.3 U5.7 | length 14.6
  Top Layer w0.2: J9.3 5.33,12.672 7.686,12.672 9.652,14.638 9.652,18.542 10.731,19.621 13.29,19.621 U5.7
AIN6_RIGHTL: J9.13 U7.7 | length 12.8
  Top Layer w0.2: J9.13 4.571,26.131 5.365,26.131 6.223,25.273 7.62,25.273 7.87,25.523 7.87,27.682 8.22,28.032 8.22,29.206 10.7,31.686 U7.7
AIN6_TOP: J7.11 U1.7 | length 20.4
  Top Layer w0.2: U1.7 25.463,16.46 26.906,15.017 30.449,15.017 35.306,10.16 35.306,4.953 34.893,4.54 J7.11
AIN7_BOT: J10.14 U8.8 | length 8.6
  Top Layer w0.2: U8.8@31.115,35.56 U8.8 31.115,38.068 30.055,39.128 30.055,42.12 31.083,43.148 J10.14
AIN7_LEFT: J8.9 U4.8 | length 8
  Top Layer w0.2: U4.8 46.164,16.7 50.546,21.082 J8.9
AIN7_RIGHT: J9.1 U5.8 | length 14.7
  Top Layer w0.2: J9.1 5.366,12.192 7.97,12.192 10.095,14.317 10.095,18.414 10.668,18.986 13.29,18.986 U5.8
AIN7_RIGHTL: J9.12 U7.8 | length 10.2
  Top Layer w0.2: J9.12 8.636,25.622 8.636,29.083 10.604,31.051 U7.8
AIN7_TOP: J7.12 U1.8 | length 16.2
  Top Layer w0.2: U1.8 24.906,17.439 24.906,16.496 26.735,14.667 30.164,14.667 33.655,11.176 33.655,7.207 J7.12
AIN8_BOT: J10.15 U8.9 | length 5.8
  Top Layer w0.2: J10.15 28.702,39.878 30.48,38.1 U8.9 U8.9@30.48,35.56
AIN8_LEFT: J8.10 U4.9 | length 11.5
  Top Layer w0.2: U4.9 45.91,17.335 49.276,20.701 49.276,21.465 50.29,22.479 51.911,22.479 J8.10
AIN8_RIGHT: J7.26 U5.9 | length 16.7
  Top Layer w0.2: U5.9 11.052,18.415 10.541,17.904 10.541,11.618 15.079,7.08 J7.26
AIN8_RIGHTL: J9.11 U7.9 | length 14.1
  Top Layer w0.2: J9.11 4.332,23.83 5.38,23.83 6.477,22.733 7.652,22.733 8.986,24.067 8.986,28.829 10.573,30.416 U7.9
AIN8_TOP: J7.13 U1.9 | length 19.2
  Top Layer w0.2: U1.9 24.257,17.453 24.257,16.65 26.59,14.317 30.015,14.317 32.766,11.566 32.766,6.096 31.242,4.572 J7.13
AIN9_BOT: J10.16 U8.10 | length 8.9
  Top Layer w0.2: J10.16 27.432,41.878 27.432,40.447 29.845,38.034 U8.10
AIN9_LEFT: J8.11 U4.10 | length 8.7
  Top Layer w0.2: U4.10 45.255,17.97 50.293,23.008 50.293,23.591 J8.11
AIN9_RIGHT: J7.25 U5.10 | length 19.5
  Top Layer w0.2: U5.10 11.327,17.78 10.891,17.344 10.891,11.842 14.224,8.509 16.002,8.509 16.419,8.092 16.421,8.092 17.014,7.499 17.014,7.239 17.032,7.221 17.032,5.57 J7.25
AIN9_RIGHTL: J9.10 U7.10 | length 11.5
  Top Layer w0.2: J9.10 6.858,21.444 9.398,23.984 9.398,28.746 10.433,29.781 U7.10
AIN9_TOP: J7.14 U1.10 | length 15.6
  Top Layer w0.2: U1.10 23.558,16.854 26.445,13.967 29.848,13.967 31.242,12.573 J7.14
AIN10_BOT: J10.17 U8.11 | length 6.6
  Top Layer w0.2: J10.17 26.67,40.608 29.21,38.068 U8.11 U8.11@29.21,35.56
AIN10_LEFT: J8.12 U4.11 | length 12.6
  Top Layer w0.2: U4.11 45.181,18.605 45.389,18.813 45.462,18.813 49.149,22.5 49.149,24.257 49.911,25.019 51.911,25.019 J8.12
AIN10_RIGHT: J7.24 U5.11 | length 16.9
  Top Layer w0.2: U5.11@13.903,17.145 U5.11 11.685,17.145 11.241,16.7 11.241,12.061 14.412,8.89 16.256,8.89 18.066,7.08 J7.24
AIN10_TOP: J7.15 U1.11 | length 18.8
  Top Layer w0.2: U1.11 22.924,16.893 26.228,13.589 29.512,13.589 30.489,12.612 30.489,8.63 30.23,8.371 30.23,6.068 J7.15
AIN11_BOT: J10.18 U8.12 | length 9.2
  Top Layer w0.2: J10.18 25.15,42.136 25.15,39.789 28.575,36.364 U8.12
AIN11_LEFT: J10.3 U4.12 | length 21.8
  Top Layer w0.2: J10.3 43.942,39.431 v1(44.631,38.742) ; U4.12 44.831,19.44 v1(44.831,20.828)
  Bottom Layer w0.2: v1(44.631,38.742) 44.731,38.642 44.731,20.928 v1(44.831,20.828)
AIN11_RIGHT: J7.23 U5.12 | length 19
  Top Layer w0.2: U5.12 12.182,16.51 11.684,16.012 11.684,12.113 14.399,9.398 16.383,9.398 17.649,8.132 18.923,8.132 19.554,7.501 19.554,5.457 18.637,4.54 J7.23
AIN11_TOP: J7.16 U1.12 | length 15.7
  Top Layer w0.2: U1.12@22.288,16.967 22.288,16.893 22.643,16.539 22.783,16.539 26.083,13.239 29.367,13.239 30.139,12.467 30.139,8.775 28.702,7.338 J7.16
AIN12_BOT: J10.19 U8.13 | length 12.3
  Top Layer w0.2: J10.19 23.622,38.796 28.575,33.843 U8.13
AIN12_RIGHT: J7.22 U5.13 | length 19.3
  Top Layer w0.2: U5.13 18.756,16.47 15.169,16.47 13.208,14.509 13.208,11.176 14.605,9.779 16.51,9.779 17.653,8.636 19.526,8.636 J7.22
AIN12_TOP: J7.17 U1.13 | length 10
  Top Layer w0.2: U1.13 22.288,9.461 23.273,8.477 23.844,8.477 24.828,7.493 24.828,4.943 25.1,4.672 26.03,4.672 J7.17
AIN13_BOT: J10.20 U8.14 | length 15.1
  Top Layer w0.2: J10.20 24.8,41.97 24.8,38.331 29.21,33.921 U8.14
AIN13_LEFT: J10.5 U4.14 | length 24.8
  Top Layer w0.2: U4.14@39.186,18.608 U4.14 40.576,18.605 42.291,20.32 v1(42.545,20.32) ; v1(41.402,38.354) J10.5
  Bottom Layer w0.2: v1(41.402,38.354) 42.545,37.211 v1(42.545,20.32)
AIN13_RIGHT: J7.21 U5.14 | length 22.7
  Top Layer w0.2: v1(14.224,14.478) 13.716,13.97 13.716,11.176 14.732,10.16 16.764,10.16 17.78,9.144 20.449,9.144 22.225,7.368 22.225,5.683 J7.21 ; v1(17.399,17.145) U5.14
  Bottom Layer w0.2: v1(14.224,14.478) 14.224,14.761 16.608,17.145 v1(17.399,17.145)
AIN13_TOP: J7.18 U1.14 | length 6.8
  Top Layer w0.2: U1.14 22.82,11.971 22.82,9.692 23.685,8.827 24.415,8.827 J7.18
AIN14_BOT: J10.21 U8.15 | length 17.4
  Top Layer w0.2: J10.21 27.686,34.004 27.686,29.718 28.448,28.956 29.591,28.956 29.845,29.21 U8.15
AIN14_LEFT: J10.6 U4.15 | length 29
  Top Layer w0.2: U4.15 41.417,17.97 41.988,18.542 v1(42.164,18.542) ; v1(40.39,38.354) 40.39,42.136 J10.6
  Bottom Layer w0.2: v1(40.39,38.354) 41.529,37.215 41.529,19.939 42.164,19.304 v1(42.164,18.542)
AIN14_RIGHT: J7.20 U5.15 | length 22.5
  Top Layer w0.2: U5.15 19.346,17.78 19.554,17.572 19.627,17.572 19.939,17.26 19.939,16.395 19.546,16.002 16.703,16.002 14.224,13.523 14.224,11.215 14.929,10.51 16.909,10.51 17.132,10.287 17.272,10.287 18.065,9.494 20.594,9.494 20.69,9.398 21.304,9.398 J7.20
AIN14_TOP: J7.19 U1.15 | length 8.3
  Top Layer w0.2: v1(23.495,10.287) 23.527,10.319 23.527,12.042 U1.15
  Bottom Layer w0.2: v1(23.495,10.287) 23.495,9.398 22.606,8.509 22.606,5.556 J7.19
CNVSTb_ADC: J4.12 U1.16 U4.16 U5.16 U7.16 U8.16 | length 233.3
  Top Layer w0.2: v1(15.748,30.48) 15.78,30.448 17.422,30.448 U7.16 ; v1(16.909,18.415) U5.16 ; U1.16 24.194,10.66 v1(25.255,9.599) 25.255,8.718 25.853,8.119 27.06,8.119 27.69,7.489 27.69,3.298 v1(28.321,2.667) ; v1(30.449,31.877) 30.464,31.862 30.464,30.387 U8.16 ; v1@37.823,17.335 U4.16
  Bottom Layer w0.2: J4.12 13.872,71.56 13.872,68.355 4.318,58.801 4.318,47.488 4.775,47.031 27.22,47.031 28.19,46.061 52.872,46.061 56.261,42.672 56.261,5.969 52.959,2.667 v1(28.321,2.667) ; v1(16.909,18.415) 19.812,21.318 19.812,28.448 17.78,30.48 v1(15.748,30.48) 17.145,31.877 v1(30.449,31.877) 30.449,30.765 35.687,25.527 35.687,19.477 v1(37.592,17.572) 37.548,17.529 37.548,16.847 32.639,11.938 27.829,11.938 25.49,9.599 v1(25.255,9.599)
CSb_ADC_BOT: J4.16 U8.20 | length 84.7
  Top Layer w0.2: U8.20 v1(33.02,32.258) ; v1(38.1,30.734) v1(38.1,33.274)
  Bottom Layer w0.2: J4.16 9.398,72.167 9.398,68.707 2.794,62.103 2.794,45.974 3.175,45.593 23.749,45.593 24.634,44.708 24.634,38.739 27.432,35.941 33.34,35.941 35.499,33.782 37.583,33.782 38.091,33.274 v1(38.1,33.274) ; v1(33.02,32.258) 33.058,32.296 34.632,32.296 34.822,32.486 36.348,32.486 v1(38.1,30.734)
CSb_ADC_LEFT: J4.13 U4.20 | length 108.7
  Top Layer w0.2: U4.20@38.835,14.759 v1(42.799,14.759) ; U4.20@39.157,14.827 U4.20
  Bottom Layer w0.2: J4.13 12.923,68.832 3.937,59.846 3.937,46.928 4.184,46.681 27.075,46.681 28.317,45.439 47.408,45.439 48.133,44.714 48.133,20.093 v1(42.799,14.759)
CSb_ADC_RIGHT: J4.20 U5.20 | length 72.4
  Top Layer w0.2: v1(17.014,20.131) 17.014,20.256 17.712,20.955 U5.20
  Bottom Layer w0.2: J4.20 3.937,71.786 3.937,68.453 1.27,65.786 1.27,20.447 1.586,20.131 v1(17.014,20.131)
CSb_ADC_RIGHTL: J4.17 U7.20 | length 65.2
  Top Layer w0.2: U7.20 19.621,32.956 v1(20.193,33.528) ; v1(23.241,33.528) 23.241,36.701 23.368,36.828 v1(23.368,36.83)
  Bottom Layer w0.2: J4.17 7.843,68.549 2.413,63.119 2.413,45.847 3.048,45.212 21.971,45.212 22.444,44.739 22.444,38.389 23.278,37.555 23.278,36.92 v1(23.368,36.83) ; v1(20.193,33.528) v1(23.241,33.528)
CSb_ADC_TOP: J4.21 U1.20 | length 91
  Top Layer w0.2: v1(25.4,10.668) 25.584,10.668 25.838,10.922 26.628,10.922 26.701,10.995 26.701,12.042 U1.20
  Bottom Layer w0.2: J4.21 2.763,69.309 0.762,67.308 0.762,9.271 1.27,8.763 20.32,8.763 22.987,11.43 24.638,11.43 v1(25.4,10.668)
CSb_DAC: J4.6 U6.5 | length 34.1
  Top Layer w0.2: v1(43.053,59.436) 43.18,59.309 43.18,58.882 45.166,56.896 U6.5
  Bottom Layer w0.2: J4.6 22.094,72.163 22.094,67.354 22.9,66.548 36.034,66.548 43.053,59.529 v1(43.053,59.436)
EOCb_ADC_BOT: J4.15 U8.24 | length 82
  Top Layer w0.2: U8.24 35.637,30.449 35.637,31.332 35.941,31.635 v1(35.941,31.811) ; v1(38.862,29.123) 38.862,32.067 39.157,32.362 v1(39.157,32.385)
  Bottom Layer w0.2: J4.15 10.383,68.549 3.175,61.341 3.175,46.228 3.46,45.943 23.894,45.943 25.006,44.831 25.019,44.831 25.019,39.118 27.815,36.322 36.195,36.322 39.157,33.36 v1(39.157,32.385) ; v1(35.941,31.811) 38.629,29.123 v1(38.862,29.123)
EOCb_ADC_LEFT: J4.14 U4.24 | length 110.4
  Top Layer w0.2: v1(38.481,11.566) 38.561,11.646 38.561,12.178 38.639,12.255 U4.24
  Bottom Layer w0.2: J4.14 11.332,71.56 11.332,68.355 3.525,60.548 3.525,46.513 3.707,46.331 26.716,46.331 27.958,45.089 43.96,45.089 45.304,43.745 45.304,40.355 46.101,39.558 46.101,19.186 v1(38.481,11.566)
EOCb_ADC_RIGHT: J4.19 U5.24 | length 64.7
  Top Layer w0.2: v1(10.604,24.511) 10.604,24.353 10.891,24.067 16.764,24.067 17.336,23.495 U5.24
  Bottom Layer w0.2: J4.19 5.303,68.422 1.651,64.77 1.651,25.527 1.905,25.273 6.86,25.273 7.622,24.511 v1(10.604,24.511)
EOCb_ADC_RIGHTL: J4.18 U7.24 | length 68.2
  Top Layer w0.2: v1(14.859,36.449) 15.811,35.496 U7.24
  Bottom Layer w0.2: J4.18 6.731,72.04 6.731,68.58 4.923,66.772 4.88,66.772 2.032,63.924 2.032,45.72 2.921,44.831 21.463,44.831 22.094,44.2 22.094,37.207 v1(21.971,37.084) 21.169,36.282 15.026,36.282 v1(14.859,36.449)
EOCb_ADC_TOP: J4.22 U1.24 | length 100.4
  Top Layer w0.2: v1(26.416,8.89) 26.731,8.89 27.152,8.469 28.995,8.469 29.391,8.864 29.391,10.136 29.273,10.253 U1.24
  Bottom Layer w0.2: J4.22 2.763,72.359 0.381,69.977 0.381,58.801 0.412,58.77 0.412,9.126 1.156,8.382 20.635,8.382 23.302,11.049 23.749,11.049 24.17,10.628 24.17,9.729 25.009,8.89 v1(26.416,8.89)
GND: C3.2 C4.2 C6.2 C7.2 C9.2 C10.2 C11.2 C12.2 C13.2 C14.2 C15.2 C16.2 C17.2 C18.2 C19.2 C20.2 C21.2 C22.2 C23.2 C24.2 C25.2 C26.2 C27.2 IC1.5 IC2.5 IC3.5 J1.2 J1.3 J2.1 J7.1 J7.2 J7.3 J7.4 J7.27 J7.28 J7.29 J7.30 J8.13 J8.14 J8.15 J8.16 J8.17 J8.18 J8.19 J8.20 J8.22 J9.2 J10.1 J10.27 J10.28 J10.29 J10.30 pad.1 pad.2 pad.3 pad.4 pad.5 R5.2 U1.18 U2.3 U3.2 U4.18 U5.18 U6.2 U7.18 U8.18 | length 508.7
  Top Layer w0.2: 5.303,57.785 5.366,57.722 C17.2 R5.2 ; pad.2@5.397,5.525 pad.2@5.524,5.652 ; 11.684,62.23 11.687,62.233 ; C12.2 15.336,57.189 16.032,57.189 16.071,57.15 ; C4.2@16.891,13.206 C4.2@17.206,12.89 ; U5.18 U5.18@18.873,19.762 ; C3.2 C3.2@19.227,12.788 ; C24.2@20.397,30.265 C24.2 ; C20.2@20.563,25.809 20.563,25.852 20.912,26.201 C20.2 C20.2@21.043,26.289 ; 21.231,16.541 21.511,16.541 23.643,14.409 23.752,14.409 25.463,12.698 U1.18 ; C19.2@33.782,18.791 C19.2@33.929,18.644 ; C26.2@35.433,27.686 C26.2 ; C18.2@36.019,17.297 C18.2 C18.2@36.119,17.297 ; C23.2 46.088,50.419 C23.2@46.584,50.915 ; 46.267,1.592 46.482,1.807 ; 47.913,39.177 48.006,39.177 ; pad.1 pad.1@52.007,5.778
  Top Layer w0.3: C14.2 13.84,52.132 15.367,53.659 15.367,57.158 15.336,57.189 ; C4.2@17.206,12.89 19.177,12.89 19.177,14.323 21.231,16.377 21.231,16.541 21.231,19.282 v1(21.209,19.304) ; U7.18 18.975,31.686 C24.2@20.397,30.265 ; U5.18@18.873,19.762 19.823,19.762 19.868,19.807 19.871,19.807 20.293,20.228 20.293,20.231 20.563,20.501 C20.2@20.563,25.809 ; C24.2 23.886,30.265 24.369,29.781 v1(24.511,29.781) ; C20.2@21.043,26.289 C21.2 v1@22.987,24.511 ; U8.18 31.75,28.829 32.893,27.686 35.433,27.686 C26.2@35.88,27.239 ; C19.2 34.376,18.517 34.798,18.517 C18.2@36.019,17.297 ; 34.513,62.103 35.978,60.638 35.978,55.952 35.778,55.752 34.926,55.752 U2.3 ; C18.2@36.119,17.297 37.35,16.066 U4.18
  Top Layer w0.4: IC3.5 8.963,48.932 5.805,48.932 5.303,49.434 5.303,57.785 5.303,58.149 9.387,62.233 ; 15.244,62.233 16.071,61.406 ; C15.2 29.54,50.936 30.016,50.46 C13.2 C6.2@37.327,49.719 ; C7.2@37.327,52.07 C6.2@37.327,49.719 ; C23.2 45.687,50.066 45.687,49.243 45.453,49.009 38.473,49.009 37.763,49.719 C6.2@37.327,49.719 ; C23.2@46.584,50.915 46.584,55.916 47.564,56.896 U6.2 52.385,56.896 52.451,56.83
  Top Layer w0.5: IC2.5 16.071,57.15 16.071,61.406 16.071,62.23 ; IC1.5 25.921,62.233 ; v1(33.274,24.826) 35.88,24.826 C26.2@35.88,27.239 ; C19.2 34.036,21.177 ; C10.2 38.801,36.693 38.828,36.72 40.276,36.72 40.926,37.37 45.815,37.37 46.007,37.178
  Top Layer w1: pad.2@5.397,5.525 6.445,4.477 9.33,1.592 13.149,1.592 ; pad.4@5.461,42.037 pad.4 ; pad.2@5.524,5.652 5.493,5.683 2.413,8.763 2.413,39.016 2.413,41.97 2.413,58.42 6.226,62.233 9.387,62.233 11.687,62.233 ; 11.684,62.23 16.071,62.23 ; 13.462,1.592 46.267,1.592 47.821,1.592 pad.1@52.007,5.778 ; 15.244,62.233 25.921,62.233 50.292,62.233 ; pad.5 35.448,76.058 35.684,76.058 36.102,75.64 J1.2 ; pad.1@52.07,5.715 55.245,8.89 55.245,25.527 54.388,26.384 J8.14 ; J8.22 J8.22@53.186,36.444
  Top Layer w1.5: 2.413,41.97 4.385,41.97 7.227,39.128 9.442,39.128 J10.29 J10.30 J10.28 J10.27 ; pad.2@5.588,6.321 6.858,7.591 J9.2 ; pad.2@6.667,4.699 10.922,4.699 J7.30 J7.28 J7.27 ; v1(27.94,21.304) 40.788,21.304 42.926,23.442 42.926,25.758 44.539,27.371 44.704,27.371 44.704,35.875 46.007,37.178 48.006,39.177 pad.3@51.468,42.639 ; J1.2 36.402,72.216 33.782,69.596 J2.1 33.782,66.172 37.501,62.454 ; J1.2@36.402,75.756 38.545,75.756 J1.3@41.402,78.613 ; J7.3 J7.1 ; J7.4 J7.2 J7.1 ; 46.482,1.807 J7.1 ; J10.1 47.913,39.177 ; 50.292,62.233 50.543,62.233 52.451,60.325 52.451,56.83 52.451,42.418 pad.3@51.689,41.656 ; J8.13 J8.14 J8.16 ; J8.15 J8.16 ; J8.17 J8.18 ; J8.19 J8.20 ; J8.22 J8.20 ; J8.16 J8.18 ; J8.18 J8.20
  Bottom Layer w0.2: v1(21.209,19.304) v1@21.273,19.367
  Bottom Layer w0.4: v1@21.273,19.367 21.273,21.526 23.114,23.368 ; v1(23.114,24.645) 23.114,23.368 ; 24.599,25.019 24.599,24.853 ; v1(27.94,21.304) 24.599,24.645 24.599,24.853 ; 23.114,23.368 24.599,24.853
  Bottom Layer w0.5: 24.599,25.019 v1@24.599,29.503 ; v1(33.274,21.336) v1(33.274,24.826)
LDACb_VGA: J4.7 U2.7 | length 33.6
  Top Layer w0.2: U2.7 38.239,55.237 38.239,57.67 39.751,59.182 v1(39.751,59.237)
  Bottom Layer w0.2: J4.7 20.543,67.533 20.53,67.52 20.53,67.354 21.971,65.913 36.174,65.913 40.101,61.986 40.101,59.763 39.751,59.413 v1(39.751,59.237)
NetC1_1: C1.1 U2.9 | length 2.7
  Top Layer w0.3: U2.9 41.083,56.237 C1.1@41.968,56.237
NetC2_1: C2.1 IC2.4 R2.1 R3.2 | length 8.7
  Top Layer w0.2: IC2.4@18.001,56.112 IC2.4 17.976,56.473 18.442,56.473 19.04,57.071 C2.1 R2.1
  Top Layer w0.3: IC2.4@18.001,56.112 R3.2
NetC5_1: C5.1 IC1.4 U2.1 | length 10
  Top Layer w0.2: IC1.4 27.826,56.493 27.98,56.647 27.98,57.846 28.196,58.062 C5.1
  Top Layer w0.3: IC1.4 28.083,56.112 28.708,56.737 U2.1
NetC5_2: C5.2 C8.1 IC1.1 R1.2 TP1.1 | length 16.8
  Top Layer w0.2: 23.933,57.489 C8.1 ; TP1.1@24.602,50.165 25.921,51.484 IC1.1 ; 25.083,54.864 25.741,54.864 25.757,54.847 26.164,54.847 27.06,55.744 C5.2 R1.2
  Top Layer w0.3: C8.1 24.558,58.012 25.083,57.487 25.083,54.864 25.083,53.932 25.443,53.572 IC1.1
NetC8_2: C8.2 R3.1 | length 2.9
  Top Layer w0.2: C8.2 22.233,57.35 23.471,56.112 R3.1
NetC17_1: C17.1 IC3.3 R4.2 R5.1 | length 7.8
  Top Layer w0.2: C17.1 R5.1 ; R5.1@8.058,56.042 R4.2@9.558,56.042
  Top Layer w0.3: C17.1@6.271,55.804 7.058,55.017 IC3.3
  Top Layer w0.4: R5.1 R5.1@7.824,55.999 ; R5.1@8.058,56.042 7.867,56.042 R5.1@7.824,55.999 ; R5.1@7.824,55.999 7.824,55.703 7.562,55.703 7.562,55.737 R5.1@7.824,55.999
NetIC1_3: IC1.3 IC2.3 IC3.1 IC3.4 U2.2 | length 39.2
  Top Layer w0.2: IC3.4 7.058,50.419 7.824,51.185 8.245,51.185 8.963,51.903 IC3.1 ; IC2.3 18.141,53.712 v2(19.69,53.712) ; IC1.3 27.826,53.953 27.98,54.107 29.153,54.107 29.69,54.644 31.784,54.644 v2(32.877,55.737) 33.407,55.737
  Top Layer w0.3: 33.407,55.737 33.907,56.237 U2.2
  Top Layer w0.4: IC3.1 v2(11.073,52.578) v2@11.318,52.578
  Bottom Layer w0.2: v2(11.073,52.578) 18.557,52.578 v2(19.69,53.712) 23.274,53.712 23.284,53.721
  Bottom Layer w0.3: 23.284,53.721 23.999,54.437 28.69,54.437 29.99,55.737 v2(32.877,55.737)
NetR1_1: R1.1 U2.10 | length 13.6
  Top Layer w0.2: R1.1 v2(35.043,59.837) ; U2.10 39.854,56.737 v2(39.854,57.718)
  Bottom Layer w0.2: v2(35.043,59.837) 37.162,57.718 v2(39.854,57.718)
POS_CALIB: C1.2 J10.4 U4.13 | length 39.6
  Top Layer w0.2: U4.13 39.266,19.318 40.518,19.318 42.504,21.304 v1(43.307,21.304) ; v1(42.164,46.99) 42.164,44.926 J10.4 43.942,42.039 42.672,40.769 v1(42.672,38.354) ; v1(42.164,50.292) C1.2
  Bottom Layer w0.2: v1(42.164,46.99) v1(42.164,50.292) ; v1(42.672,38.354) 43.307,37.719 v1(43.307,21.304)
POS_CALIB_GAIN: C2.2 IC2.1 J5.1 J6.1 R2.2 TP2.1 | length 65.6
  Top Layer w0.2: IC2.1 16.071,54.644 17.34,55.913 ; R2.2 C2.2 17.34,55.913 ; TP2.1 20.828,54.162 19.812,55.178 17.518,55.178 17.34,55.355 17.34,55.913
  Bottom Layer w0.2: TP2.1 20.999,50.463 21.38,50.463 24.13,53.213 42.799,53.213 51.816,62.23 51.816,68.199 ; J6.1 51.816,68.199 ; J5.1@52.07,75.311 51.816,75.057 51.816,68.199
SCLK: J4.9 U1.21 U2.4 U4.21 U5.21 U6.4 U7.21 U8.21 | length 185.9
  Top Layer w0.2: v1(9.525,43.815) 9.525,45.538 10.445,46.458 v1@10.445,47.889 ; v1(12.777,63.968) 18.003,69.194 J4.9 ; v1(17.145,21.444) 17.291,21.59 U5.21 ; U7.21 18.521,33.591 19.346,34.417 v1(19.346,34.544) 20.955,36.153 v1(20.955,37.719) ; U1.21 27.368,10.937 27.051,10.62 27.051,9.701 27.432,9.32 v1(27.432,9.144) ; U8.21 33.617,30.409 33.617,31.901 33.695,31.978 v1@33.695,33.058 ; U2.4 34.089,55.237 33.885,55.033 33.885,53.806 34.292,53.4 35.917,53.4 36.877,54.359 36.877,59.057 37.719,59.898 v1(37.719,60.362) 43.397,60.362 45.318,58.441 45.318,57.998 45.166,57.846 U6.4 ; v1(36.069,14.032) 36.171,13.93 37.237,13.93 37.467,14.16 U4.21
  Bottom Layer w0.2: v1(9.525,43.815) 9.91,43.43 9.91,39.112 11.303,37.719 v1(20.955,37.719) ; v1(10.604,48.006) 10.323,48.288 10.323,61.514 v1(12.777,63.968) 33.295,63.968 33.375,64.048 34.033,64.048 v1(37.719,60.362) ; v1(17.145,21.444) 17.126,21.444 16.51,20.828 15.113,20.828 12.893,23.048 12.893,34.136 13.436,34.679 19.211,34.679 v1(19.346,34.544) 29.718,34.544 31.496,32.766 31.623,32.766 ; v1(27.432,9.144) 27.432,9.32 27.051,9.701 27.051,10.353 27.787,11.089 33.126,11.089 v1(36.069,14.032) 36.171,13.93 37.806,13.93 38.267,14.391 38.267,20.407 37.846,20.828 37.846,24.13 31.623,30.353 31.623,32.766 ; v1(33.528,33.401) 32.258,33.401 31.623,32.766
SDIN: J4.10 U1.22 U2.5 U4.22 U5.22 U6.3 U7.22 U8.22 | length 184.6
  Top Layer w0.2: v1(9.144,42.291) 9.144,43.134 8.85,43.428 8.85,47.331 v1(9.398,47.879) ; v1(13.716,34.004) 15.198,34.004 15.421,34.227 U7.22 18.077,34.227 18.671,34.821 18.671,35.234 19.939,36.502 v1(19.939,36.957) ; v1(16.002,21.717) 16.091,21.717 16.559,22.185 18.756,22.185 U5.22 ; v1(27.813,10.16) 27.926,10.273 27.926,11.997 U1.22 ; v1(29.972,33.225) 31.08,34.334 34.086,34.334 34.203,34.216 34.203,33.168 34.388,32.983 v1@34.388,31.495 ; v1(32.877,64.643) 33.531,63.989 33.531,63.497 v1(33.655,63.373) ; v1@34.213,31.319 34.213,30.449 U8.22 ; U2.5 35.917,54.737 36.527,55.346 36.527,59.768 v1(36.703,59.944) 36.703,60.833 36.957,61.087 43.561,61.087 46.802,57.846 U6.3 ; v1(36.703,13.208) 36.821,13.326 37.428,13.326 37.55,13.448 39.111,13.448 U4.22
  Bottom Layer w0.2: v1(9.144,42.291) 9.144,39.383 11.403,37.124 19.772,37.124 v1(19.939,36.957) ; v1(9.398,47.879) 9.398,61.543 12.498,64.643 12.573,64.643 ; v1(16.002,21.717) 13.589,24.13 13.589,33.877 v1(13.716,34.004) 17.177,34.004 18.542,32.639 29.279,32.639 29.865,33.225 v1(29.972,33.225) ; J4.10 16.412,71.56 16.412,68.482 12.573,64.643 ; v1(27.813,10.16) 28.656,10.16 29.077,9.739 31.329,9.739 31.369,9.779 33.274,9.779 v1(36.703,13.208) 37.579,13.208 39.791,15.42 39.791,26.884 35.052,31.623 35.05,31.621 v1(34.292,31.621) ; v1(32.877,64.643) 12.573,64.643 ; v1(33.655,63.373) 33.655,62.484 33.909,62.23 34.417,62.23 v1(36.703,59.944)
SDOUT: J4.11 U1.23 U4.23 U5.23 U7.23 U8.23 | length 129.6
  Top Layer w0.2: v1(8.255,41.148) v1(8.255,47.706) ; v1(11.557,26.162) v1(14.605,26.162) ; v1(14.605,35.433) 15.208,34.83 17.422,34.83 U7.23 ; v1(16.764,22.86) U5.23 ; U1.23 28.599,12.034 28.599,9.261 v1(28.716,9.144) ; U8.23 35.092,30.538 35.092,33.058 34.925,33.225 v1(34.925,33.401) ; v1(37.465,12.446) 37.601,12.446 38.046,12.89 U4.23
  Bottom Layer w0.2: v1(8.255,41.148) 8.794,40.609 8.794,39.238 12.599,35.433 13.695,35.433 ; v1(8.255,47.706) 8.255,61.468 15.463,68.676 J4.11 ; v1(11.557,26.162) 12.486,27.091 12.486,34.224 13.695,35.433 ; v1(14.605,26.162) 14.605,25.019 v1(16.764,22.86) ; v1(28.716,9.144) 34.163,9.144 v1(37.465,12.446) 40.854,15.835 40.854,29.123 36.576,33.401 v1(34.925,33.401) 34.798,33.401 32.766,35.433 v1(14.605,35.433) 13.695,35.433
SYNCb_VGA: J4.8 U2.6 | length 38.2
  Top Layer w0.2: v1(38.354,58.801) 37.847,58.294 37.847,54.864 37.975,54.737 U2.6
  Bottom Layer w0.2: J4.8 19.346,71.955 19.346,67.268 21.336,65.278 32.557,65.278 32.597,65.318 36.155,65.318 39.751,61.722 39.751,60.198 v1(38.354,58.801)
VTOP: J10.2 J11.1 U6.6 | length 21.7
  Top Layer w0.2: v1(44.196,46.99) 44.196,45.434 J10.2 ; v1(44.196,50.292) 44.196,55.499 44.587,55.89 45.318,55.89 U6.6
  Bottom Layer w0.2: v1(44.196,46.99) v1(44.196,50.292) 46.516,52.612 J11.1
pads on no net: C1.0 C2.0 C3.0 C4.0 C5.0 C6.0 C7.0 C8.0 C11.0 C12.0 C13.0 C14.0 C15.0 C16.0 C17.0 C18.0 C19.0 C20.0 C21.0 C22.0 C23.0 C24.0 C25.0 C26.0 C27.0 J4.1 J4.2 J4.3 J4.4 J4.5 J5.2 J5.3 J5.4 J5.5 J8.1 J8.21 J9.15 J9.16 J9.17 J9.18 J9.19 J9.20 J9.21 J9.22 R1.0 R2.0 R3.0 R4.0 R5.0 U1.17 U4.17 U5.17 U7.11 U7.12 U7.13 U7.14 U7.15 U7.17 U8.17

## Polygon pours and split planes (outlines as drawn)
GND on Top Layer "Top Layer-GND" (solid, pour order 24): 0.889,81.28 55.88,81.28 56.261,80.899 56.261,0.762 0.889,0.762 0.762,0.889
GND on Top Layer "Top Layer-GND 1" (solid, pour order 8): 0.635,81.534
GND on Top Layer "Top Layer-GND 2" (solid, pour order 6): 0.635,81.534
GND on Bottom Layer "Bottom Layer-GND" (solid, pour order 26): 0.889,81.28 56.261,81.28 56.261,0.762 0.762,0.762
no net on Bottom Layer "Bottom Layer-No Net" (solid, pour order 16): 0.508,82.042
GND on Bottom Layer "Bottom Layer-GND 1" (solid, pour order 10): 0.635,81.407

## Silkscreen, mask and mechanical layers (free items; w line width, h text height)
Top Overlay:
  drawing of 11 lines, arcs and shapes, not listed
  text "KU Leuven / MICAS" at 15.562,67.494 h0.5
  text "Fondazione  / Bruno Kessler" at 15.494,65.151 h0.5
  text "GND" at 29.591,65.024 h1.52
  text "POSFET  / TESTBOARD" at 0.889,64.389 h1.52
  text "Mark Alea / (mark.alea@kuleuven.be)" at 1.016,62.103 h0.5
  text "VDD  / (5V)" at 35.978,60.325 h1.52
  text "Inci Temel / (itemel / @fbk.eu)" at 1.016,58.674 h0.5
  text "POS_ / CALIB_ / GAIN" at 35.58,58.42 h1.52
  text "VTOP" at 53.594,50.546 h1.52 r90
  text "*" at 53.594,1.143 h5

## Text inside footprints (layer, text, board x,y; h text height)
U1: Top Overlay "*" at 29.501,18.088 h1.27 r270; Mechanical 13 "*" at 28.804,16.726 h1.27 r270
U2: Top Overlay "*" at 34.34,56.94 h1.27; Mechanical 13 "*" at 35.597,55.94 h1.27
U3: Top Overlay "*" at 50.652,34.036 h1.27 r180; Mechanical 13 "*" at 47.717,29.781 h1.27 r180
U4: Top Overlay "*" at 45.203,12.028 h1.27 r180; Mechanical 13 "*" at 43.84,12.725 h1.27 r180
U5: Top Overlay "*" at 12.782,23.723 h1.27; Mechanical 13 "*" at 14.144,23.025 h1.27
U6: Top Overlay "*" at 48.67,55.515 h1.27 r180; Mechanical 13 "*" at 47.549,56.744 h1.27 r180
U7: Top Overlay "*" at 11.439,35.724 h1.27; Mechanical 13 "*" at 12.802,35.027 h1.27
U8: Top Overlay "*" at 35.788,36.386 h1.27 r270; Mechanical 13 "*" at 35.09,35.023 h1.27 r270